# Altium PCB ONDULADOR_PCB_POTENCIA.PcbDoc
Units mil, origin at the board's own origin, x right, y up, seen from the top; angles counter-clockwise.
Board outline 6020.03 x 4880.03 mil, 2 copper layers (Top Layer, Bottom Layer); 62 components, 33 nets, 202 pads, 3 vias.
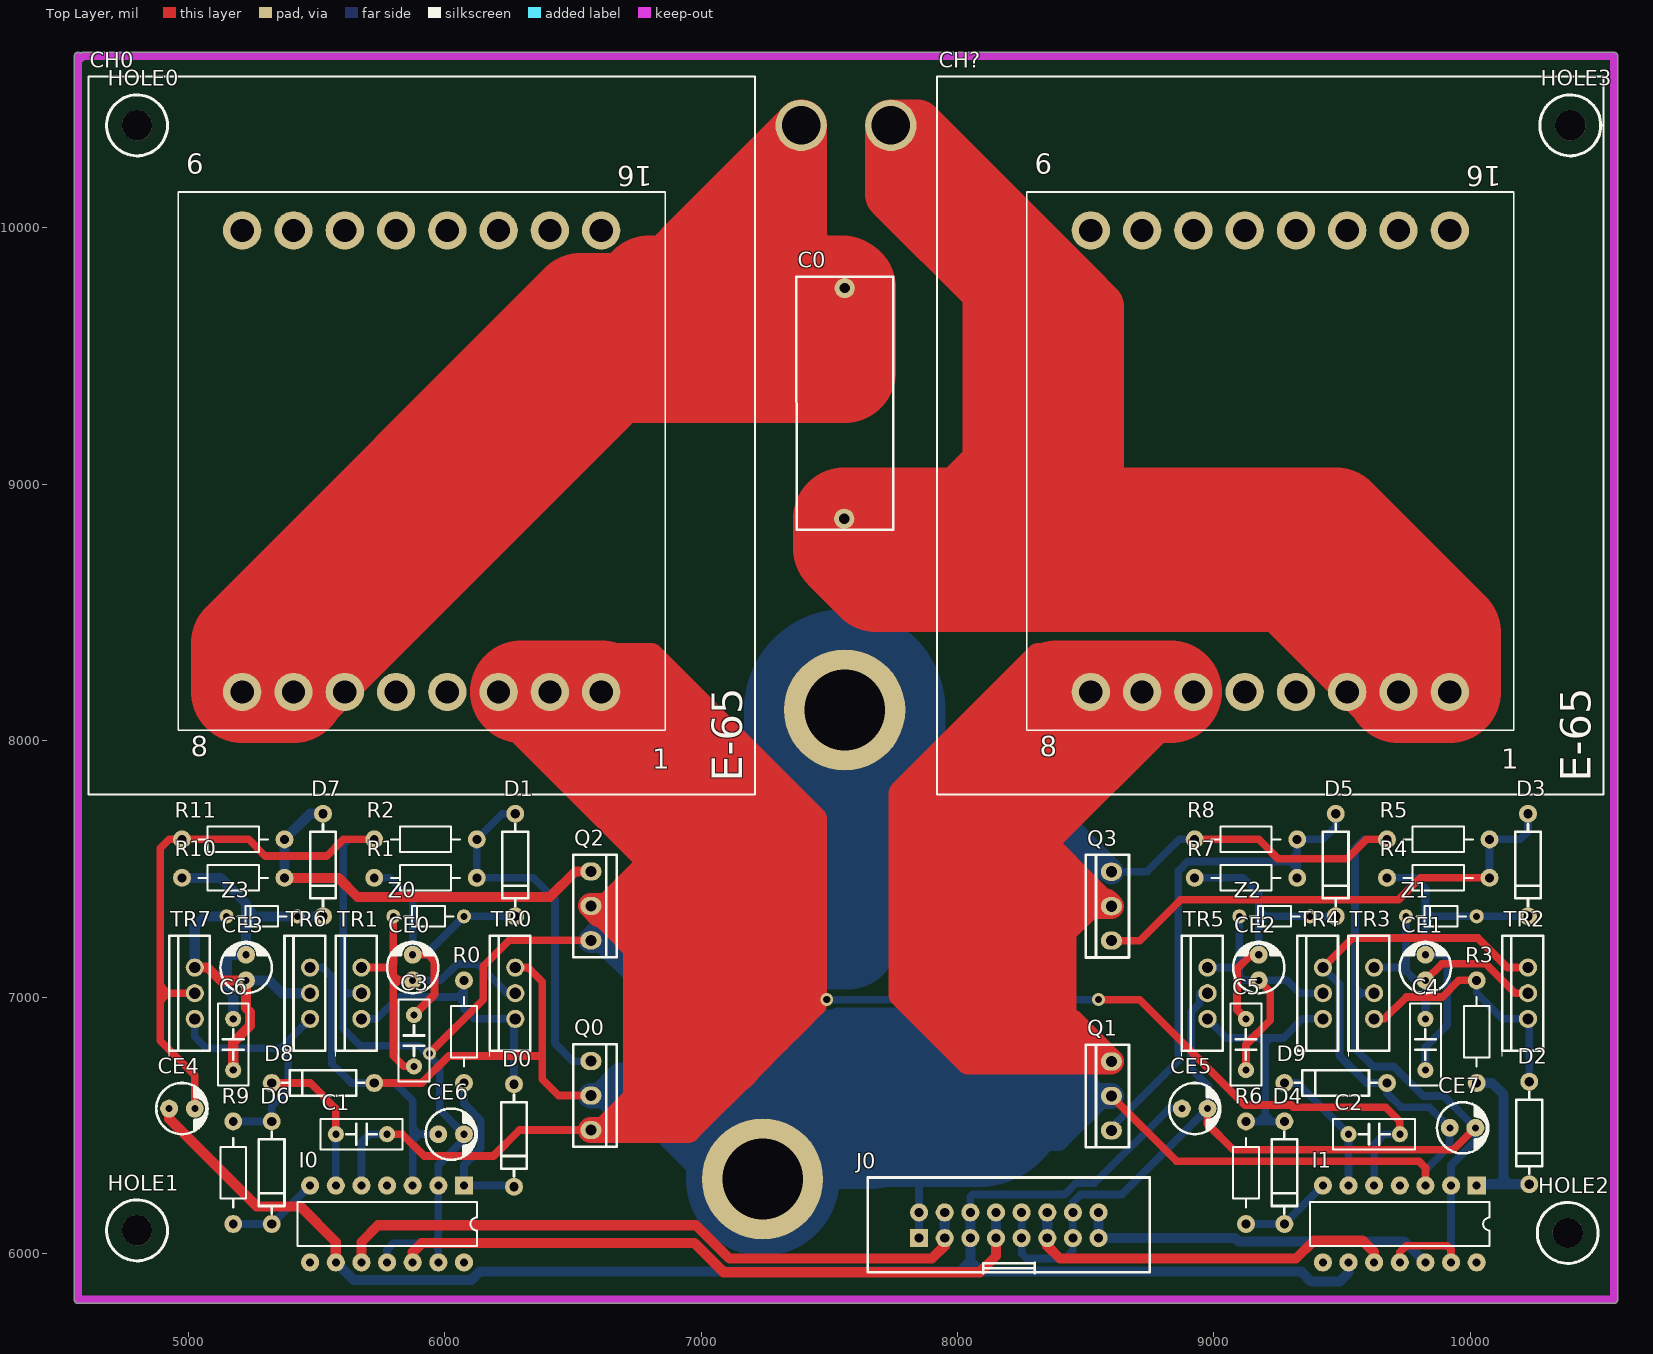
[diagram p0: Top Layer view]
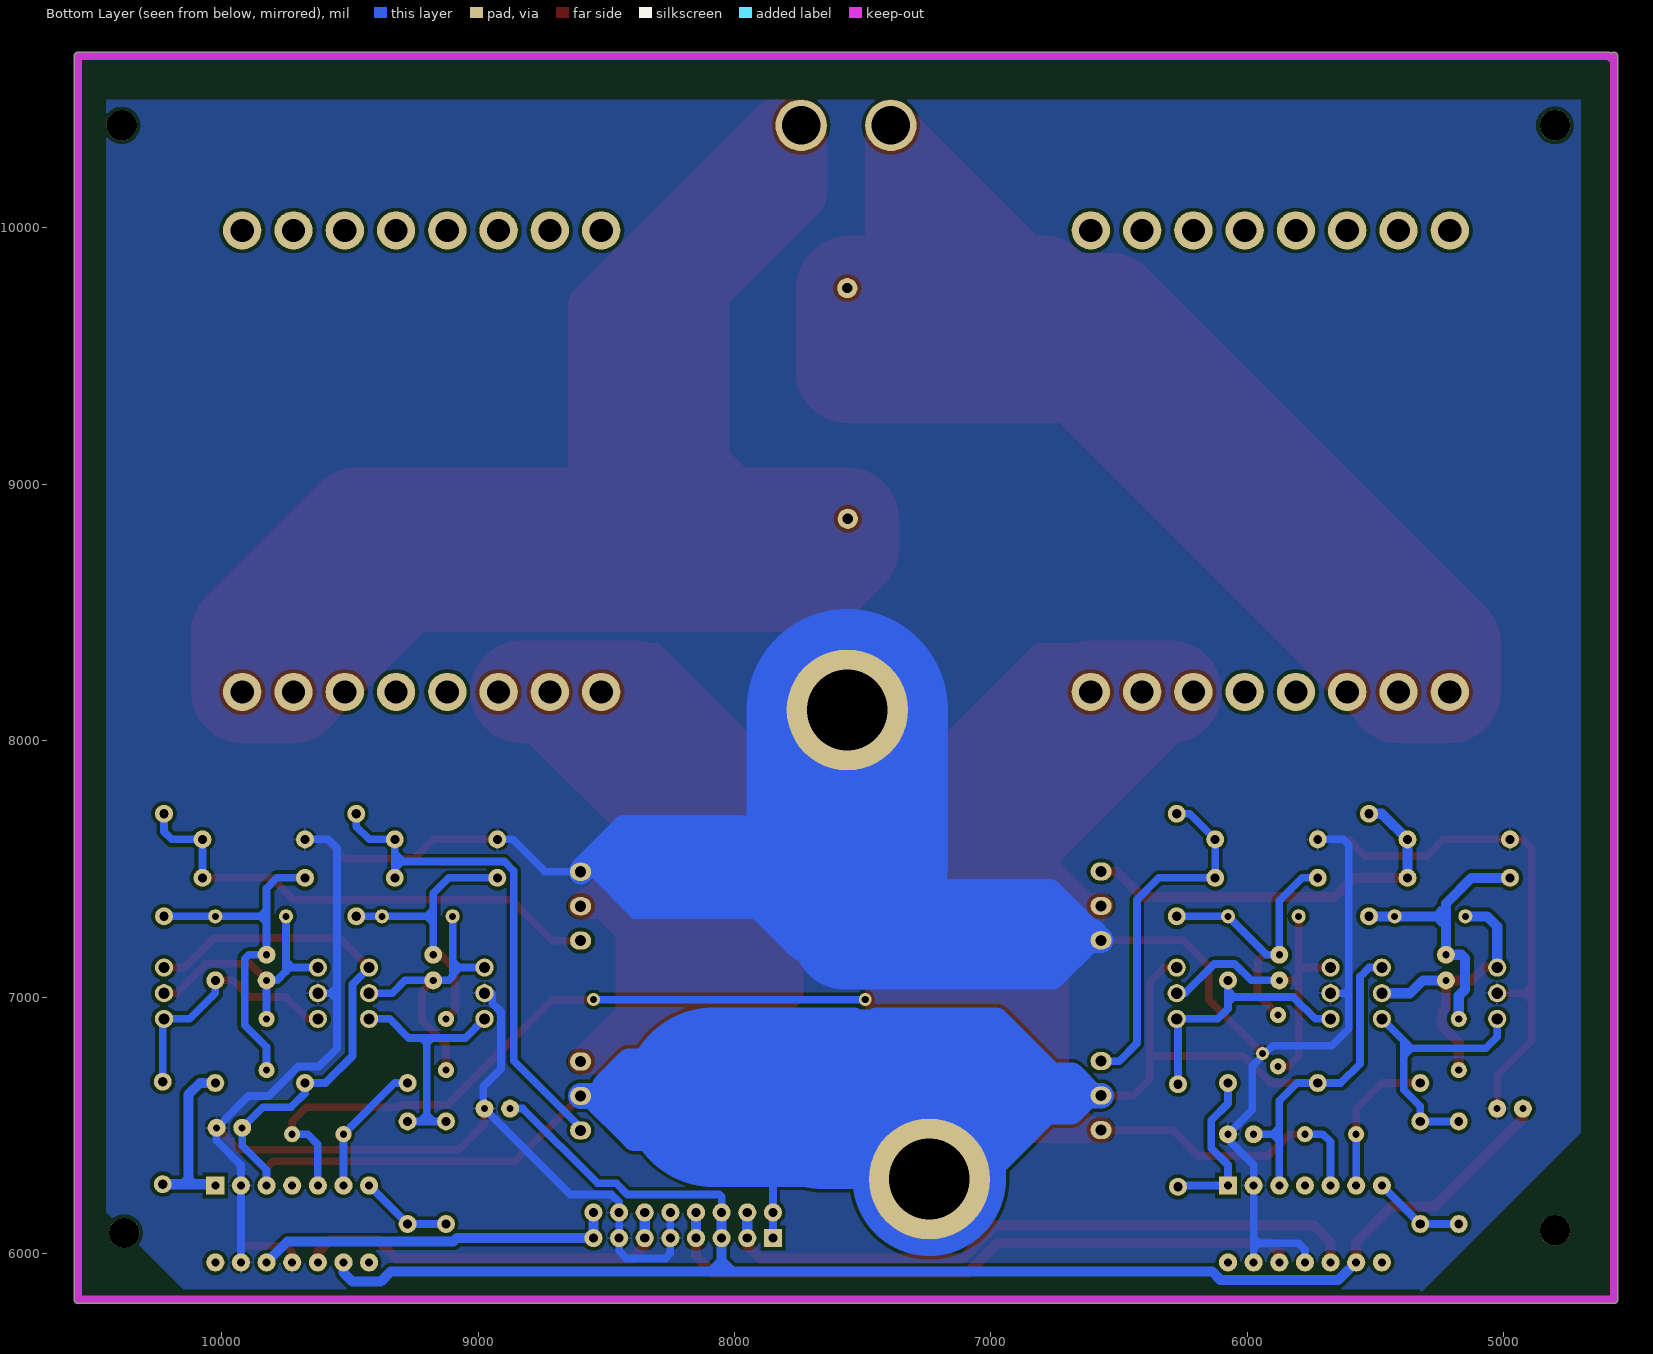
[diagram p1: Bottom Layer view, seen from below]

## Layer stack, top to bottom
Top Solder: solder mask 0.4, Solder Resist, Dk 3.5
Top Layer: signal copper 1.4
Dielectric 1: dielectric 12.6, FR-4, Dk 4.8
Bottom Layer: signal copper 1.4
Bottom Solder: solder mask 0.4, Solder Resist, Dk 3.5

## Board outline
4570,5804.98 cw(c4570,5820) 4554.98,5820 4554.98,10670 cw(c4570,10670) 4580,10681.2 cw(c4590,10670) 4590,10685.01 10560,10685.01 cw(c10560,10670) 10575.01,10670 10575.01,5820 cw(c10560,5820) 10560,5804.98

## Design rules (kind name [scope] priority, off if disabled: settings)
Clearance [All] p1: gap=14
PolygonConnect [All] p1: connectstyle=Relief reliefconductorwidth=10 reliefentries=4 polygonreliefangle="90 Angle" airgapwidth=10
RoutingVias [All] p1: holewidth=28 width=50 viastyle="Through Hole" minholewidth=28 minwidth=50 maxholewidth=28 maxwidth=50
SolderMaskExpansion [All] p1: expansion=4
UnpouredPolygon [All] p1: allowunpoured=FALSE
Width [All] p1: maxlimit=800 minlimit=14 preferedwidth=30
29 further rules are at their usual default settings.

## Components (designator, comment, footprint, x,y, rotation, side; value= is the part's Value field where it differs from the comment)
C0 "C" C9_25X9I6 7560,9710 r270 top
C1 "C" C2_7I5X2I5 5575,6465 r0 top
C2 "C" C2_7I5X2I5 9525,6465 r0 top
C3 "C" C2_7I5X2I5 5880,6730 r90 top
C4 "C" C2_7I5X2I5 9825,6915 r270 top
C5 "C" C2_7I5X2I5 9125,6715 r90 top
C6 "C" C2_7I5X2I5 5175,6715 r90 top
CE0 "CE" CP1_D5I5 5875,7065 r90 top
CE1 "CE" CP1_D5I5 9825,7065 r90 top
CE2 "CE" CP1_D5I5 9175,7065 r90 top
CE3 "CE" CP1_D5I5 5225,7065 r90 top
CE4 "CE" CP1_D5I5 4925,6565 r0 top
CE5 "CE" CP1_D5I5 8875,6565 r0 top
CE6 "CE" CP1_D5I5 5975,6465 r0 top
CE7 "CE" CP1_D5I5 9920,6490 r0 top
CH0 "CH" E65H 6610,8390 r90 top
CH? "CH" E65H 9920,8390 r90 top
D0 "D" DO41 6270,6660 r270 top
D1 "D" DO41 6275,7715 r270 top
D2 "D" DO41 10230,6670 r270 top
D3 "D" DO41 10225,7715 r270 top
D4 "D" DO41 9275,6515 r270 top
D5 "D" DO41 9475,7715 r270 top
D6 "D" DO41 5325,6515 r270 top
D7 "D" DO41 5525,7715 r270 top
D8 "D" DO41 5725,6665 r180 top
D9 "D" DO41 9675,6665 r180 top
HOLE0 "HOLE" HOLE3_D6 4800,10400 r0 top
HOLE1 "HOLE" HOLE3_D6 4800,6090 r0 top
HOLE2 "HOLE" HOLE3_D6 10380,6080 r0 top
HOLE3 "HOLE" HOLE3_D6 10390,10400 r0 top
I0 "IR2110" DIP14 6075,6265 r270 top
I1 "IR2110" DIP14 10025,6265 r270 top
J0 "CON16" CON16 7850,6060 r90 top
Q0 "Q_MOSFET" TO220/TO-3P 6570,6750 r270 top
Q1 "Q_MOSFET" TO220/TO-3P 8600,6480 r90 top
Q2 "Q_MOSFET" TO220/TO-3P 6570,7490 r270 top
Q3 "Q_MOSFET" TO220/TO-3P 8600,7220 r90 top
R0 "R" R1/4 6075,6665 r90 top
R1 "R" R1/4 5725,7465 r0 top
R2 "R" R1/4 5725,7615 r0 top
R3 "R" R1/4 10025,6665 r90 top
R4 "R4" R1/4 9675,7465 r0 top
R5 "R5" R1/4 9675,7615 r0 top
R6 "R" R1/4 9125,6115 r90 top
R7 "R4" R1/4 8925,7465 r0 top
R8 "R5" R1/4 8925,7615 r0 top
R9 "R" R1/4 5175,6115 r90 top
R10 "R4" R1/4 4975,7465 r0 top
R11 "R5" R1/4 4975,7615 r0 top
TR0 "NPN" TO220BCE 6275,7115 r90 top
TR1 "PNP" TO220BCE 5675,7115 r90 top
TR2 "NPN" TO220BCE 10225,7115 r90 top
TR3 "PNP" TO220BCE 9625,7115 r90 top
TR4 "NPN" TO220BCE 9425,7115 r90 top
TR5 "PNP" TO220BCE 8975,7115 r90 top
TR6 "NPN" TO220BCE 5475,7115 r90 top
TR7 "PNP" TO220BCE 5025,7115 r90 top
Z0 "Z" DO35 6075,7315 r180 top
Z1 "Z" DO35 10025,7315 r180 top
Z2 "Z" DO35 9375,7315 r180 top
Z3 "Z" DO35 5425,7315 r180 top

## Footprints (in the part's own frame and the unit in brackets; to place one, negate y for a bottom-side part, rotate by r counter-clockwise, add the part's x,y. Pads: shape width x height; smd on the part's side, far side on the other; paste and mask are expansions set on the pad)
C2_7I5X2I5 [mm]
  round 1.6 hole 0.7: 1(0,0) 2(5.08,0)
  silkscreen extent -1.52,-1.52 6.6,1.52
C9_25X9I6 [mm]
  round 2 hole 1: 1(-1.4,0) 2(21.45,-0.05)
  silkscreen extent -2.54,-4.8 22.54,4.82
CON16 [mm]
  rect 1.8x1.8 hole 0.9: 1(0,0)
  round 1.8 hole 0.9: 2(2.54,0) 3(0,-2.54) 4(2.54,-2.54) 5(0,-5.08) 6(2.54,-5.08) 7(0,-7.62) 8(2.54,-7.62) 9(0,-10.16) 10(2.54,-10.16) 11(0,-12.7) 12(2.54,-12.7) 13(0,-15.24) 14(2.54,-15.24) 15(0,-17.78) 16(2.54,-17.78)
  silkscreen extent -3.46,-22.86 6,5.09
CP1_D5I5 [mil]
  round 70 hole 27.56: 1(0,0) 2(100,0)
  silkscreen extent -50,-100 150,100
DIP14 [mm]
  rect 1.8x1.8 hole 0.8: 1(0,0)
  round 1.8 hole 0.8: 2(0,-2.54) 3(0,-5.08) 4(0,-7.62) 5(0,-10.16) 6(0,-12.7) 7(0,-15.24) 8(7.62,-15.24) 9(7.62,-12.7) 10(7.62,-10.16) 11(7.62,-7.62) 12(7.62,-5.08) 13(7.62,-2.54) 14(7.62,0)
  silkscreen extent 1.63,-16.51 5.99,1.27
DO35 [mm]
  round 1.4 hole 0.7: 1(0,0) 2(7,0)
  silkscreen extent 1.05,-1 5.95,1
DO41 [mil]
  round 70 hole 36: 1(0,0) 2(400,0)
  silkscreen extent 40,-50 360,50
E65H [mm]
  round 3.8 hole 2.3: 1(-5.08,0) 2(-5.08,5.08) 4(-5.08,15.24) 5(-5.08,20.32) 6(-5.08,25.4) 7(-5.08,30.48) 8(-5.08,35.56) 9(40.64,35.56) 10(40.64,30.48) 11(40.64,25.4) 12(40.64,20.32) 13(40.64,15.24) 14(40.64,10.16) 15(40.64,5.08) 16(40.64,0)
  round 3.8 hole 2.3 unplated: 3(-5.08,10.16)
  silkscreen extent -15.24,-15.24 55.88,50.8
HOLE3_D6 [mm]
  round 3 hole 3 unplated: 1(0,0)
  silkscreen extent -3.01,-3.02 3.02,3.02
R1/4 [mil]
  round 70 hole 35: 1(0,0) 2(400,0)
  silkscreen extent 65,-50 335,50
TO220/TO-3P [mm]
  oval 1.8x2.1 hole 1.1: 1(0,0) 2(3.41,0) 3(6.825,0)
  silkscreen extent -1.67,-1.75 8.49,2.54
TO220BCE [mm]
  round 1.8 hole 1.1: 1(0,0) 2(-5.08,0) 3(-2.54,0)
  silkscreen extent -8.76,-1.5 3.16,2.54

## Part data
CH0 CH?: ";CH?; ; ; ; ;Bobina con nucleo ;5"
HOLE0 HOLE1 HOLE2 HOLE3: ";HOLE? ;HOLE3_D6 ; ; ;Agujero ;20"
J0: ";J? ;CON5 ;CON5_2i54VE_JST_B2PVH ;CON5_7I62_STL960-HG-3 ;CON5_2I54V;Conector de 5 pins simples ;17"
Q0 Q1 Q2 Q3: ";Q? ;TO92EBC ;TO220BCE ;SOT23 ;TO126 ;Transistor NPN Generico ;13"
R4 R5 R7 R8 R10 R11: library part R
Z0 Z1 Z2 Z3: ";Z? ;SOD80 ;1N4004 ;1N ;SOD57 ;Zenner generico ;11"

## Free pads (board coordinates)
  round 200.44 hole 150: 0(7390,10400) 1(7740,10400)
  round 472.44 hole 314.96: 0(7560,8120) 1(7240,6290)

## Via types
v1: diameter 50, hole 28, Top Layer to Bottom Layer, 3 vias

## Nets (pads, with @x,y where several pads share a name; then routed paths per layer and width w, separated by ;. In a path a pad name is that pad's centre, name@x,y a point inside that pad or via, vN(x,y) a via of type N, cw(c..) or ccw(c..) an arc to the next point about the centre after c; other vN are vias at no path point)
230V: C0.1 CH0.6 CH0.7 CH0.8 pad.0@7390,10400 | length 9281.2
  Top Layer w200: 6798.43,9770 6798.43,9808.43 7030,10040 ; 7170,9770 7224.88,9770 ; C0.1 7390,9935.12 ; 7030,10040 7224.88,10234.88 ; 7030,10040 7120,9950 7224.88,9950 ; 7224.88,9770 7224.88,9950 ; 7224.88,9770 7390,9935.12 ; 7224.88,9950 7224.88,10234.88 ; 7224.88,10234.88 7390,10400 7390,9935.12
  Top Layer w400: 7170,9770 6798.43,9770 6729.63,9701.2 6531.2,9701.2 5210,8380 CH0.8 CH0.7 5410,8198.43 6651.57,9440 7220,9440 ; 7224.88,9770 7550,9770 7220,9440 ; C0.1 7560,9440 7220,9440
230V': C0.2 CH?.1 CH?.2 CH?.3 pad.1@7740,10400 | length 13902.1
  Top Layer w200: 7900,8865.51 8120,9085.51 ; 8550,8865.51 8550,9692.99 8466.5,9776.5 ; pad.1@7740,10400 8255,9885 ; pad.1@7740,10400 7842.99,10400 8466.5,9776.5 ; pad.1@7740,10400 7740,10130 8120,9750 8120,9085.51 ; 8120,9085.51 8230,8975.51 ; 8120,9085.51 8120,8865.51 8230,8975.51 ; 8230,8975.51 8340,8865.51 ; 8230,8975.51 8255,9000.51 8255,9885 ; 8255,9885 8340,9800 8340,8865.51 ; 8340,8865.51 8466.5,8992.01 8466.5,9776.5
  Top Layer w400: CH?.2 CH?.2@9720,8198.43 ; 9052.92,8865.51 8550,8865.51 8340,8865.51 8120,8865.51 7900,8865.51 C0.2 7558.03,8749.67 7683.49,8624.21 9294.21,8624.21 ; 9052.92,8865.51 9294.21,8624.21 ; 9052.92,8865.51 9474.49,8865.51 9920,8420 CH?.1 9728.43,8190 CH?.2@9720,8198.43 ; 9294.21,8624.21 CH?.2@9720,8198.43
+5V: CE4.1 CE5.1 I0.9 I1.9 J0.5 J0.6 | length 6403.7
  Top Layer w39.37: CE4.1 4925,6525 5266.31,6183.69 5436.31,6183.69 5575,6045 I0.9
  Bottom Layer w30: J0.6 8050,6220 8060,6230 8417.77,6230 8461.77,6274 8534,6274 8825,6565 CE5.1
  Bottom Layer w39.37: I0.9 5577.25,5965 5646.37,5895.88 6103.63,5895.88 6137.75,5930 8010,5930 ; J0.6 J0.5 8050,5970 ; I1.9 9525,5925 9490,5890 9380,5890 9340,5930 8090,5930 ; 8010,5930 8050,5930 ; 8010,5930 8050,5970 ; 8050,5930 8090,5930 ; 8050,5930 8050,5970 ; 8050,5970 8090,5930
+12V: CE6.1 CE7.1 D8.1 D9.1 I0.3 I1.3 J0.1 J0.2 pad.1@7240,6290 Q0.2 Q1.2 TR0.1 TR2.1 TR4.1 TR6.1 | length 12977.7
  Top Layer w30: TR6.1@5470,7120 TR6.1 ; D8.1 5910.55,6665 ; 5915.55,6670 5910.55,6665 ; TR0.1 6325,7115 6380,7060 6380,6770 ; Q0.2 6444.25,6615.75 6380,6680 6380,6770 ; Q1.2 8854.25,6360 9800,6360 9825,6335 I1.3 ; TR4.1 9540,7230 10030,7230 10145,7115 TR2.1 ; 5910.55,6665 6015.55,6770 6380,6770
  Bottom Layer w30: TR6.1 5525,7115 5560,7080 5560,6740 5635,6665 D8.1 5805,6665 5875,6595 5875,6490 ; I0.3 5875,6440 ; 5880,6465 5900,6465 ; CE6.1 5900,6465 ; J0.1 J0.2 7850,6380 ; TR4.1 9490,7050 9490,6770 9595,6665 D9.1 9675,6625 9730,6570 9840,6570 CE7.1 9920,6420 9825,6325 I1.3 ; 5875,6440 5900,6465 ; 5875,6440 5875,6490 ; 5875,6490 5900,6465
  Bottom Layer w100: Q0.2 Q0.2@6605.75,6615.75 ; pad.1@7105.75,6270 7105.75,6230 6837.87,6497.87 ; 8084.25,6614.25 8220,6750 8410,6750 8505.75,6654.25 8505.75,6614.25 ; 8294.25,6614.25 8505.75,6614.25 ; Q1.2 8554.25,6614.25 ; Q0.2@6605.75,6615.75 6685,6695 6765,6695 ; Q0.2@6605.75,6615.75 6624.25,6615.75 ; 6624.25,6615.75 6687.13,6552.87 6782.87,6552.87 ; 6624.25,6615.75 6685.75,6615.75 ; 6685.75,6615.75 6720,6615.75 ; 6685.75,6615.75 6765,6695 ; 6720,6615.75 6782.87,6552.87 ; 6720,6615.75 6780,6615.75 ; 6765,6695 6980,6910 7080,6910 ; 6780,6615.75 6840,6615.75 6840,6670 ; 6780,6615.75 6834.25,6670 6840,6670 ; 6782.87,6552.87 6837.87,6497.87 ; 6837.87,6497.87 6875,6535 6875,6705 ; 6840,6670 6875,6705 ; 6875,6705 7080,6910 ; 7080,6910 7444.14,6910 7453.14,6901 7526.86,6901 7535.86,6910 7780,6910 8080,6610 8240,6450 8390,6450 8554.25,6614.25 ; 8505.75,6614.25 8554.25,6614.25
  Bottom Layer w200: 8290,6610 8294.25,6614.25
  Bottom Layer w300: 8080,6610 8290,6610
  Bottom Layer w600: pad.1@7240,6290 7240,6550
  Bottom Layer w700: 7240,6550 7300,6610 7319.87,6610 7328.87,6601 7651.13,6601 7660.13,6610 8080,6610
A: I0.10 J0.3 J0.4 | length 2586.5
  Top Layer w39.37: I0.10 5675,6045 5740,6110 6040,6110 6980,6110 7110,5980 7900,5980 7950,6030 J0.3
  Bottom Layer w39.37: J0.3 J0.4
A': D0.2 I0.1 R0.1 | length 650.9
  Bottom Layer w30: R0.1 6075,6585 6140,6520 6140,6410 6075,6345 I0.1 6265,6265 D0.2
A'': D1.1 Q0.1 R1.2 R2.2 | length 1410.6
  Bottom Layer w30: D1.1 6225,7715 R2.2 R1.2 6345,7465 6430,7380 6430,6820 6500,6750 Q0.1
B: I1.12 J0.15 J0.16 | length 1414.4
  Bottom Layer w39.37: J0.16 J0.15 9082.86,6060 9096.55,6046.31 9743.69,6046.31 I1.12
B': D2.2 I1.1 R3.1 | length 727.3
  Bottom Layer w39.37: I1.1 10030,6270 10110,6270 ; R3.1 10085,6665 10130,6620 10130,6290 ; D2.2@10220,6270 10150,6270 ; 10110,6270 10130,6270 ; 10110,6270 10130,6290 ; 10130,6270 10130,6290 ; 10130,6270 10150,6270 ; 10130,6290 10150,6270
B'': D3.1 Q3.1 R4.2 R5.2 | length 1958.9
  Top Layer w30: Q3.1 8710,7220 8870,7380 9720,7380 9805,7465 R4.2
  Bottom Layer w30: R4.2 R5.2 10195,7615 10225,7645 D3.1
C: I1.10 J0.11 J0.12 | length 1513.3
  Top Layer w39.37: J0.11 8350,6030 8400,5980 9320,5980 9390,6050 9580,6050 9625,6005 I1.10
  Bottom Layer w39.37: J0.11 J0.12
C': D4.2 I1.7 R6.1 | length 362.1
  Bottom Layer w30: R6.1 D4.2 I1.7
C'': D5.1 Q1.1 R7.2 R8.2 | length 2059.3
  Bottom Layer w30: Q1.1 8600,6490 8861,6751 8861,7491.51 8898.49,7529 9294,7529 ; R7.2 9325,7500 ; D5.1 9475,7665 9425,7615 R8.2 9325,7560 ; 9294,7529 9296,7529 ; 9294,7529 9325,7560 ; 9296,7529 9314,7529 9325,7540 ; 9296,7529 9325,7500 ; 9325,7500 9325,7540 ; 9325,7540 9325,7560
D: I0.12 J0.7 J0.8 | length 2572.7
  Top Layer w39.37: I0.12 5875,6005 5910,6040 6974.52,6040 7087.89,5926.63 8086.63,5926.63 8150,5990 J0.7
  Bottom Layer w39.37: J0.7 J0.8
D': D6.2 I0.7 R9.1 | length 362.1
  Bottom Layer w30: R9.1 D6.2 I0.7
D'': D7.1 Q2.1 R10.2 R11.2 | length 1608.9
  Top Layer w39.37: R10.2 5585,7465 5660,7390 6410,7390 6510,7490 Q2.1
  Bottom Layer w39.37: R10.2 R11.2 5475,7715 D7.1
NetC1_1: C1.1 D8.2 I0.6 | length 591.4
  Top Layer w30: D8.2 5475,6665 5575,6565 C1.1
  Bottom Layer w30: I0.6 C1.1
NetC2_1: C2.1 D9.2 I1.6 | length 532.8
  Bottom Layer w30: D9.2 9325,6665 C2.1 I1.6
NetC3_1: C3.1 CE0.1 TR0.3 TR1.1 Z0.2 | length 1422.2
  Top Layer w30: TR1.1 5785,7115 ; Z0.2 5799.41,7129.41 ; 5800,7150 5800,7130 5799.41,7129.41 ; CE0.1 5819.7,7065 ; C3.1 5840,6730 5799.41,6770.59 5799.41,7044.7 ; 5785,7115 5799.41,7129.41 ; 5785,7115 5799.41,7100.59 ; 5799.41,7044.7 5799.41,7070 ; 5799.41,7044.7 5819.7,7065 ; 5799.41,7070 5799.41,7085.3 ; 5799.41,7070 5804.41,7065 5819.7,7065 ; 5799.41,7085.3 5799.41,7100.59 ; 5799.41,7085.3 5819.7,7065 ; 5799.41,7100.59 5799.41,7129.41
  Bottom Layer w30: CE0.1 5984.49,7065 6048.49,7129 6129,7129 6243,7015 TR0.3
NetC3_2: C3.2 CE0.2 D1.2 R1.1 Z0.1 | length 1197.9
  Top Layer w30: CE0.2 5935,7165 5960,7140 5960,7010 C3.2
  Bottom Layer w30: R1.1 5785,7465 5875,7375 CE0.2 5925,7165 Z0.1 D1.2
NetC4_1: C4.1 CE1.1 TR2.3 TR3.1 Z1.2 | length 1091.5
  Top Layer w30: CE1.1 9890,7130 10060,7130 10175,7015 TR2.3
  Bottom Layer w30: TR3.1 9734.41,7115 ; Z1.2 9749.41,7140 ; C4.1 CE1.1 9784.41,7065 9749.41,7100 ; 9734.41,7115 9734.41,7125 9749.41,7140 ; 9734.41,7115 9749.41,7100 ; 9749.41,7100 9749.41,7140
NetC4_2: C4.2 CE1.2 D3.2 R4.1 Z1.1 | length 1460.8
  Bottom Layer w30: R4.1 9785,7465 9825,7425 9825,7340 ; C4.2 9825,6805 9910,6890 9910,7150 9895,7165 CE1.2 9825,7290 ; D3.2 Z1.1 9850,7315 ; 9825,7290 9825,7310 ; 9825,7290 9850,7315 ; 9825,7310 9825,7340 ; 9825,7310 9830,7315 9850,7315 ; 9825,7340 9850,7315
NetC5_1: C5.1 CE2.1 TR4.3 TR5.1 Z2.2 | length 1199.4
  Top Layer w30: C5.1 9125,6815 9220,6910 9220,7020 CE2.1
  Bottom Layer w30: TR5.1@8970,7110 TR5.1 9074.41,7115 ; Z2.2 9099.41,7140 ; TR4.3 9335,7015 9285,7065 CE2.1 9115,7065 9099.41,7080.59 9099.41,7090 ; 9074.41,7115 9099.41,7090 ; 9074.41,7115 9094.41,7115 9099.41,7110 ; 9074.41,7115 9099.41,7140 ; 9099.41,7090 9099.41,7110 ; 9099.41,7110 9099.41,7140
NetC5_2: C5.2 CE2.2 D5.2 R7.1 Z2.1 | length 1204.9
  Top Layer w30: C5.2 9090,6950 9090,7110 9145,7165 CE2.2
  Bottom Layer w30: R7.1 9115,7465 9175,7405 9175,7340 ; CE2.2 9175,7290 ; D5.2 Z2.1 9200,7315 ; 9175,7290 9175,7310 ; 9175,7290 9200,7315 ; 9175,7310 9175,7340 ; 9175,7310 9180,7315 9200,7315 ; 9175,7340 9200,7315
NetC6_1: C6.1 CE3.1 TR6.3 TR7.1 Z3.2 | length 1175.7
  Top Layer w39.37: TR7.1 5075,7115 5125,7065 CE3.1 5225,6957.18 5240.18,6942 5240.18,6888 5175,6822.82 C6.1
  Bottom Layer w39.37: TR7.1 5025,7275 5065,7315 Z3.2 ; CE3.1 5315,7065 5365,7015 TR6.3
NetC6_2: C6.2 CE3.2 D7.2 R10.1 Z3.1 | length 1210.8
  Bottom Layer w39.37: R10.1 5125,7465 5225,7365 5225,7340 ; C6.2 5175,7005 5150,7030 5150,7150 5165,7165 CE3.2 5225,7290 ; D7.2 Z3.1 5260,7315 ; 5225,7290 5225,7310 ; 5225,7290 5235,7290 5260,7315 ; 5225,7310 5225,7340 ; 5225,7310 5230,7315 5260,7315 ; 5225,7340 5235,7340 5260,7315
NetD0_1: D0.1 R0.2 TR0.2 TR1.2 | length 1084.6
  Bottom Layer w30: TR1.2 5735,6915 5820,7000 6050,7000 ; R0.2 6075,7025 ; D0.1 6270,6910 TR0.2 6115,6915 6075,6955 6075,6980 ; 6050,7000 6055,7000 ; 6050,7000 6075,7025 ; 6055,7000 6070,7000 6075,7005 ; 6055,7000 6075,6980 ; 6075,6980 6075,7005 ; 6075,7005 6075,7025
NetD2_1: D2.1 R3.2 TR2.2 TR3.2 | length 1002
  Top Layer w30: TR3.2 9665,6915 9750,7000 9890,7000 9955,7065 R3.2
  Bottom Layer w30: R3.2 10025,7015 10039,7001 ; 10040,7000 10039,7001 ; D2.1 10230,6910 TR2.2 10125,6915 10039,7001
NetD4_1: D4.1 R6.2 TR4.2 TR5.2 | length 1119.4
  Bottom Layer w30: TR5.2 9050,6840 9180,6840 ; R6.2 9175,6515 ; 9230,6515 9225,6515 ; D4.1 9225,6515 ; TR4.2 9345,6915 9270,6840 9220,6840 ; 9175,6515 9200,6515 ; 9175,6515 9200,6540 ; 9180,6840 9200,6840 ; 9180,6840 9200,6820 ; 9200,6515 9225,6515 ; 9200,6515 9200,6540 ; 9200,6540 9225,6515 ; 9200,6540 9200,6820 ; 9200,6820 9220,6840 ; 9200,6820 9200,6840 ; 9200,6840 9220,6840
NetD6_1: D6.1 R9.2 TR6.2 TR7.2 | length 1146.8
  Bottom Layer w30: TR7.2 5025,6845 5070,6800 5360,6800 ; R9.2 D6.1 5325,6574.49 5389,6638.49 5389,6771 ; TR6.2 5389,6829 ; 5360,6800 5389,6771 ; 5360,6800 5389,6800 ; 5360,6800 5389,6829 ; 5389,6771 5389,6800 ; 5389,6800 5389,6829
NetQ2_1: CE4.2 CE5.2 CE6.2 CE7.2 I0.2 I0.11 I0.13 I1.2 I1.11 I1.13 J0.9 J0.10 J0.13 J0.14 pad.0@7560,8120 Q2.3 Q3.3 R2.1 R5.1 R8.1 R11.1 TR1.3 TR3.3 TR5.3 TR7.3 | length 21483.4
  Top Layer w30: 4895,7015 4920,7015 ; CE4.2 5025,6695 4890,6830 4890,6990 ; TR7.3 4920,7015 ; R2.1 5605,7615 5540,7550 5300,7550 5235,7615 R11.1 4925,7615 4890,7580 4890,7040 ; v1(5940,6780) 6150,6990 6150,7120 6251.3,7221.3 Q2.3 ; R8.1 9175,7615 9250,7540 9520,7540 9595,7615 R5.1 ; CE5.2 8975,6505 9076,6404 9934,6404 CE7.2 ; I1.11 9725,6005 9750,6030 9910,6030 9925,6015 I1.13 ; 4890,6990 4895,6990 4920,7015 ; 4890,6990 4890,7040 ; 4890,7040 4895,7040 4920,7015
  Bottom Layer w30: TR1.3 5619,7015 ; R2.1 5625,7615 5604,7594 5604,7030 ; I0.11 5775,6015 5800,6040 5955,6040 ; I0.13 5975,6020 ; 7570,7230 7660,7320 8390,7320 Q3.3@8558.7,7488.7 ; J0.10 J0.9 8250,6000 8270,5980 8420,5980 8450,6010 J0.13 J0.14 8450,6200 8480,6230 8640,6230 CE5.2 8980,6570 8980,6651.13 8910.57,6720.57 8910.57,6941.69 8945,6976.12 8945,7015 TR5.3 ; 8320,7360 8350,7330 8370,7330 8528.7,7488.7 Q3.3@8558.7,7488.7 ; R8.1 8865,7615 8738.7,7488.7 Q3.3 Q3.3@8558.7,7488.7 ; TR3.3 9575,7015 ; R5.1 9585,7615 9550,7580 9550,7040 ; I1.13 I1.2 9925,6345 10020,6440 CE7.2 9896,6614 9816.51,6614 9701.51,6729 9621,6729 9550,6800 9550,6990 ; 5604,7000 5604,7010 ; 5604,7000 5604,6876 5670,6810 5900,6810 5980,6730 5980,6560 CE6.2 6075,6445 5975,6345 I0.2 5975,6060 ; 5604,7000 5619,7015 ; 5604,7010 5604,7030 ; 5604,7010 5609,7015 5619,7015 ; 5604,7030 5619,7015 ; 5955,6040 5975,6040 ; 5955,6040 5975,6060 ; 5955,6040 5975,6020 ; 5975,6020 5975,6040 ; 5975,6040 5975,6060 ; 9550,6990 9550,7020 ; 9550,6990 9575,7015 ; 9550,7020 9550,7040 ; 9550,7020 9555,7015 9575,7015 ; 9550,7040 9575,7015
  Bottom Layer w100: 6630,7231.3 6651.3,7231.3 ; 6748.7,7231.3 6688.7,7231.3 ; 6990,7230 6840,7080 ; 7340,7230 7190,7080 6840,7080 ; 7390,7410 6830,7410 ; 8361.3,7508.7 8461.3,7508.7 ; 8480,7508.7 8467.92,7508.7 ; Q3.3 8428.7,7660 8310,7660 ; 6651.3,7231.3 6688.7,7231.3 ; 6651.3,7231.3 6830,7410 ; 6688.7,7231.3 6840,7080 ; 6830,7410 6770.78,7410 6617.09,7256.31 6605.02,7256.31 Q2.3 6618.7,7221.3 6760,7080 6840,7080 ; 8310,7660 7980,7660 7828.7,7508.7 7838.7,7498.7 7977.4,7360 8320,7360 8374.66,7414.66 8374.66,7415.44 8467.92,7508.7 ; 8310,7660 8461.3,7508.7 ; 8461.3,7508.7 8467.92,7508.7
  Bottom Layer w200: 6748.7,7231.3 6798.7,7231.3 6800,7230 6900,7230 ; 8251.3,7508.7 8361.3,7508.7
  Bottom Layer w300: 6900,7230 6990,7230 7030,7230 ; 8161.3,7508.7 8251.3,7508.7
  Bottom Layer w400: 7030,7230 7340,7230 7570,7230 7570,7510 7570,7990 pad.0@7560,8120 ; 7660,7320 7838.7,7498.7 7848.7,7508.7 ; 7828.7,7508.7 7848.7,7508.7 ; 8161.3,7508.7 7848.7,7508.7
  Bottom Layer w787.4: pad.0@7560,8120 7560,7520 7570,7510
VS1: C1.2 C2.2 CH0.1 CH0.2 CH0.3 I0.5 I1.5 Q0.3 Q2.2 | length 19793.4
  Top Layer w30: C1.2 5835,6465 5920,6380 6190,6380 6291.3,6481.3 Q0.3 6738.7,6650 6745,6650 ; v1(8550,6990) 8710,6990 9121,6579 9301.51,6579 9310.51,6570 9670,6570 9725,6515 C2.2
  Top Layer w90: 6630,7365.75 6635.2,7365.75 ; 6844.35,6565.65 6854.35,6575.65 6854.35,6664.35 6854.35,7280 6854.35,7355.75 6854.35,7365.75 ; 6870,7365.75 6854.35,7365.75 ; 6953.71,6800 6990,6800 7060,6800 7078.7,6800 7190,6800 6958.15,6568.15 ; 7080,7480 7060,7500 6980,7580 6960,7580 6849.45,7580 6789.73,7520.27 ; 6635.2,7365.75 6700,7365.75 ; 6635.2,7365.75 6789.73,7520.27 ; 6700,7365.75 6854.35,7365.75 ; 6700,7365.75 6789.73,7455.47 ; 6789.73,7455.47 6854.35,7390.85 6854.35,7365.75 ; 6789.73,7455.47 6789.73,7520.27
  Top Layer w100: CH0.2 6550,8330 6805.42,8330 6872.71,8262.71 ; Q0.3 6620,6481.3 ; 6844.35,6565.65 6760,6481.3 ; 6854.35,6575.65 7078.7,6800 ; 6870,7365.75 6860,7355.75 6854.35,7355.75 Q2.2 6605.02,7320.73 6617.09,7320.73 6657.82,7280 ; 6958.15,6568.15 6871.3,6481.3 ; 6990,6800 6854.35,6664.35 6790,6600 ; 7060,7280 6854.35,7280 6790,7280 ; 7190,6800 7190,6722.6 ; 7230,7790 6830,8190 6690,8190 ; 6620,6481.3 6671.3,6481.3 ; 6620,6481.3 6703.7,6565 6745,6565 ; 6657.82,7280 6790,7280 ; 6657.82,7280 6745,7192.82 6745,6650 6745,6565 ; CH0.1@6665.42,8190 6690,8190 ; CH0.1@6665.42,8190 CH0.1 7060,7740 7140,7740 ; CH0.1@6665.42,8190 6738.14,8262.71 6872.71,8262.71 ; 6671.3,6481.3 6750,6560 ; 6671.3,6481.3 6760,6481.3 ; 6690,8190 7140,7740 ; 6745,6565 6750,6560 ; 6750,6560 6790,6600 ; 6760,6481.3 6871.3,6481.3 ; 6790,6600 6790,7280 ; 6871.3,6481.3 6948.7,6481.3 7190,6722.6 ; 6872.71,8262.71 7300,7835.42 ; 7140,7740 7300,7580 ; 7140,7740 7300,7740 ; 7190,6722.6 7300,6832.6 ; 7300,6832.6 7300,7580 ; 7300,6832.6 7365.42,6898.02 ; 7300,7580 7300,7740 ; 7300,7740 7300,7835.42 ; 7300,7835.42 7365.42,7770 ; 7365.42,6898.02 7440,6972.6 7440,7695.42 7365.42,7770 ; 7365.42,6898.02 7365.42,7770
  Top Layer w400: 6298.8,8190 CH0.2 ; CH0.1 CH0.2 ; 6960,7580 6410,8130 CH0.2 ; 7060,6800 7060,7280 7060,7500
  Bottom Layer w30: I0.5 5675,6435 5705,6465 C1.2 ; v1(7490,6990) v1(8550,6990) ; I1.5 9625,6425 9665,6465 C2.2
VS2: CH?.6 CH?.7 CH?.8 Q1.3 Q3.2 | length 14096.7
  Top Layer w100: 8831.2,8190 8691.2,8330 8314.58,8330 7780,7795.42 7780,7350 ; 7780,7010 7840,6950 ; 7780,7010 8090,7010 ; 7780,7010 7820,7050 8130,7050 ; 7780,7010 7780,7130 ; 7780,7130 7780,7210 ; 7780,7130 8210,7130 ; 7780,7210 7780,7290 ; 7780,7210 8290,7210 ; 7780,7290 7780,7350 ; 7780,7290 7795,7305 8385,7305 ; 7780,7350 7784.25,7354.25 8210,7354.25 ; 7840,6950 8041.3,6748.7 8171.3,6748.7 ; 7840,6950 7970,6950 8000,6920 ; 8000,6920 8085.65,6834.35 ; 8000,6920 8090,7010 ; 8000,6920 8308.7,6920 ; 8085.65,6834.35 8171.3,6748.7 ; 8085.65,6834.35 8394.35,6834.35 ; 8090,7010 8130,7050 ; 8090,7010 8304.14,7010 8325,6989.14 ; 8130,7050 8210,7130 ; 8130,7050 8325,7050 ; 8171.3,6748.7 8480,6748.7 ; 8210,7130 8290,7210 ; 8210,7130 8325,7130 ; 8210,7354.25 8364.25,7354.25 ; 8210,7354.25 8322.13,7466.38 ; 8290,7210 8325,7245 ; 8308.7,6920 8394.35,6834.35 ; 8308.7,6920 8364.14,6920 8383.14,6901 8413.14,6901 ; 8322.13,7466.38 8379.25,7409.25 ; 8322.13,7466.38 8235,7553.5 8235,7705 8400.37,7539.63 ; 8322.13,7466.38 8395.37,7539.63 8400.37,7539.63 ; 8325,6989.14 8325,7050 ; 8325,6989.14 8413.14,6901 ; 8325,7050 8325,7130 ; 8325,7130 8325,7245 ; 8325,7245 8385,7305 ; 8325,7245 8330,7240 8400,7240 ; 8344.25,7374.25 8379.25,7409.25 ; 8344.25,7374.25 8414.25,7374.25 ; 8344.25,7374.25 8364.25,7354.25 ; 8364.25,7354.25 8434.25,7354.25 ; 8379.25,7409.25 8450,7480 8460,7480 ; 8379.25,7409.25 8414.25,7374.25 ; 8385,7305 8434.25,7354.25 ; 8394.35,6834.35 8480,6748.7 ; 8400,7240 8413.14,7226.86 8413.14,6901 ; 8400,7240 8514.25,7354.25 ; 8400.37,7539.63 8460,7480 ; 8413.14,6901 8447.7,6901 Q1.3 Q1.3@8565.43,6748.7 ; 8413.14,6901 Q1.3@8565.43,6748.7 ; 8414.25,7374.25 8454.25,7374.25 ; 8414.25,7374.25 8434.25,7354.25 ; 8434.25,7354.25 8514.25,7354.25 ; 8434.25,7354.25 8454.25,7374.25 ; 8454.25,7374.25 Q3.2@8565.75,7374.25 ; 8460,7480 Q3.2@8565.75,7374.25 ; 8480,6748.7 Q1.3@8565.43,6748.7 ; 8514.25,7354.25 Q3.2@8585.75,7354.25 ; Q3.2@8565.75,7374.25 Q3.2@8585.75,7354.25 ; Q3.2@8565.75,7374.25 8580,7374.25 Q3.2 Q3.2@8585.75,7354.25
  Top Layer w400: 8831.2,8190 CH?.7 ; CH?.7 8235,7705 8000,7470 8000,7803.29 8386.71,8190 CH?.8 CH?.7
pads on no net: CH0.4 CH0.5 CH0.9 CH0.10 CH0.11 CH0.12 CH0.13 CH0.14 CH0.15 CH0.16 CH?.4 CH?.5 CH?.9 CH?.10 CH?.11 CH?.12 CH?.13 CH?.14 CH?.15 CH?.16 HOLE0.1 HOLE1.1 HOLE2.1 HOLE3.1 I0.4 I0.8 I0.14 I1.4 I1.8 I1.14

## Polygon pours and split planes (outlines as drawn)
NetQ2_1 on Bottom Layer "GND" (solid, remove dead copper, pour order 12): 10450,10500 4700,10500 4700,6470 5320,5850 5330,5860 10150,5860 10450,6160

## Keep-outs
Keep-Out Layer:
  lines w30: 4570,5820 4570,10670 4580,10660 4590,10670 10560,10670 10560,5820 4570,5820

## Text inside footprints (layer, text, board x,y; h text height)
CH0: Top Overlay "E-65" at 7160,7840 h118.11 r90; Top Overlay "16" at 6810,10240 h78.74 r180; Top Overlay "9" at 5060,10290 h78.74 r180; Top Overlay "8" at 5010,7940 h78.74; Top Overlay "1" at 6810,7890 h78.74
CH?: Top Overlay "E-65" at 10470,7840 h118.11 r90; Top Overlay "16" at 10120,10240 h78.74 r180; Top Overlay "9" at 8370,10290 h78.74 r180; Top Overlay "8" at 8320,7940 h78.74; Top Overlay "1" at 10120,7890 h78.74